# EAGLE board hhv-dcdarknet-display (EAGLE 7.2.0)
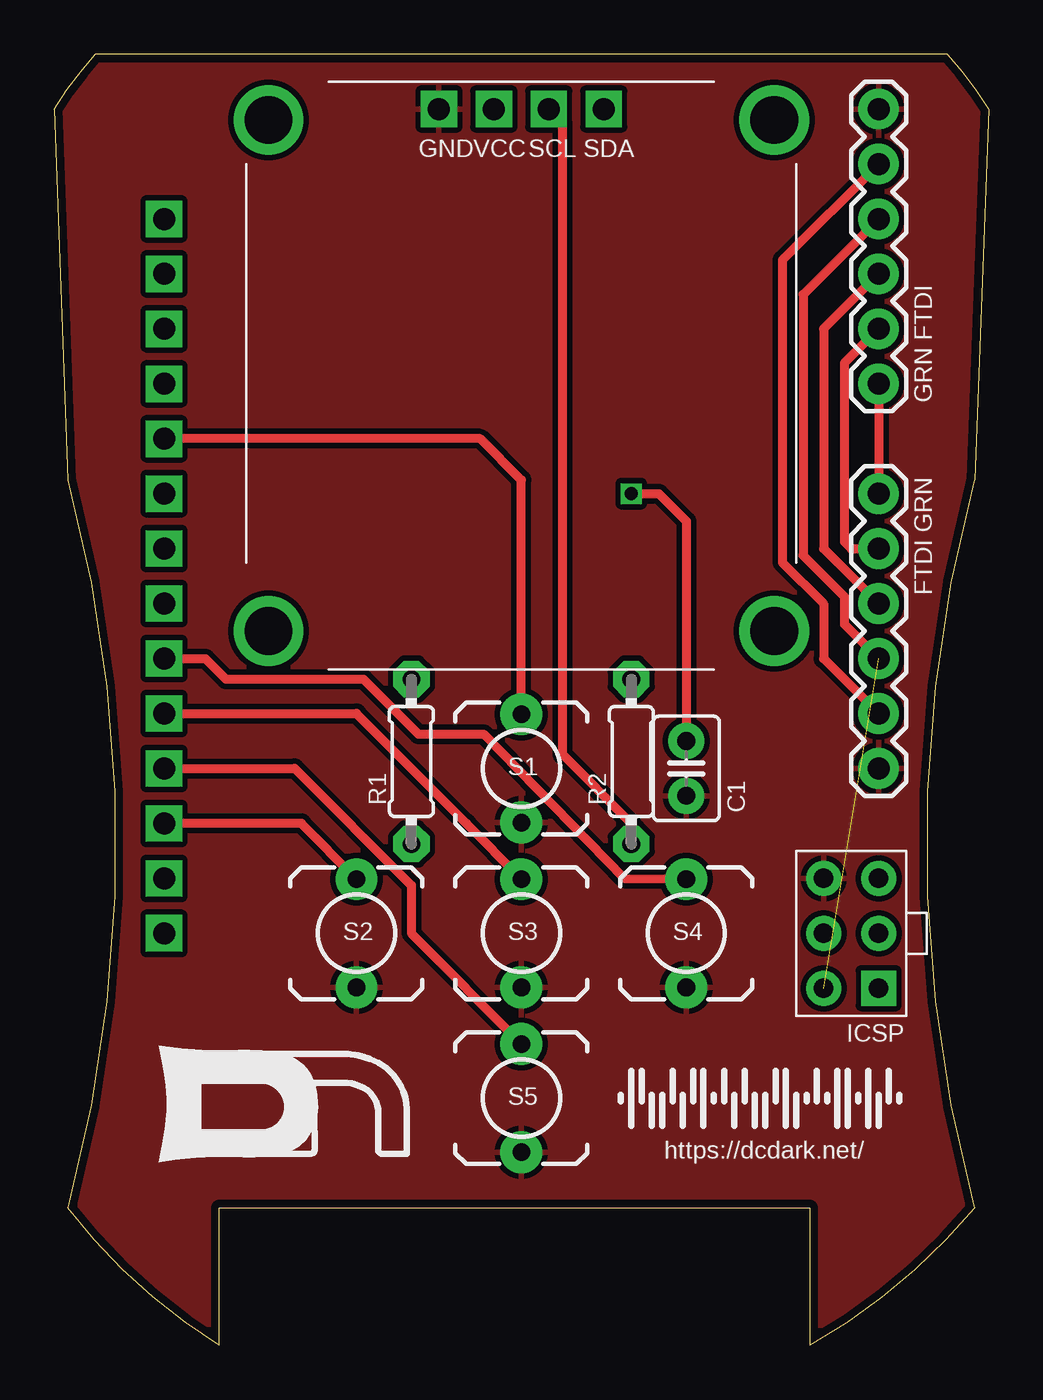
[diagram p0: board, top side]
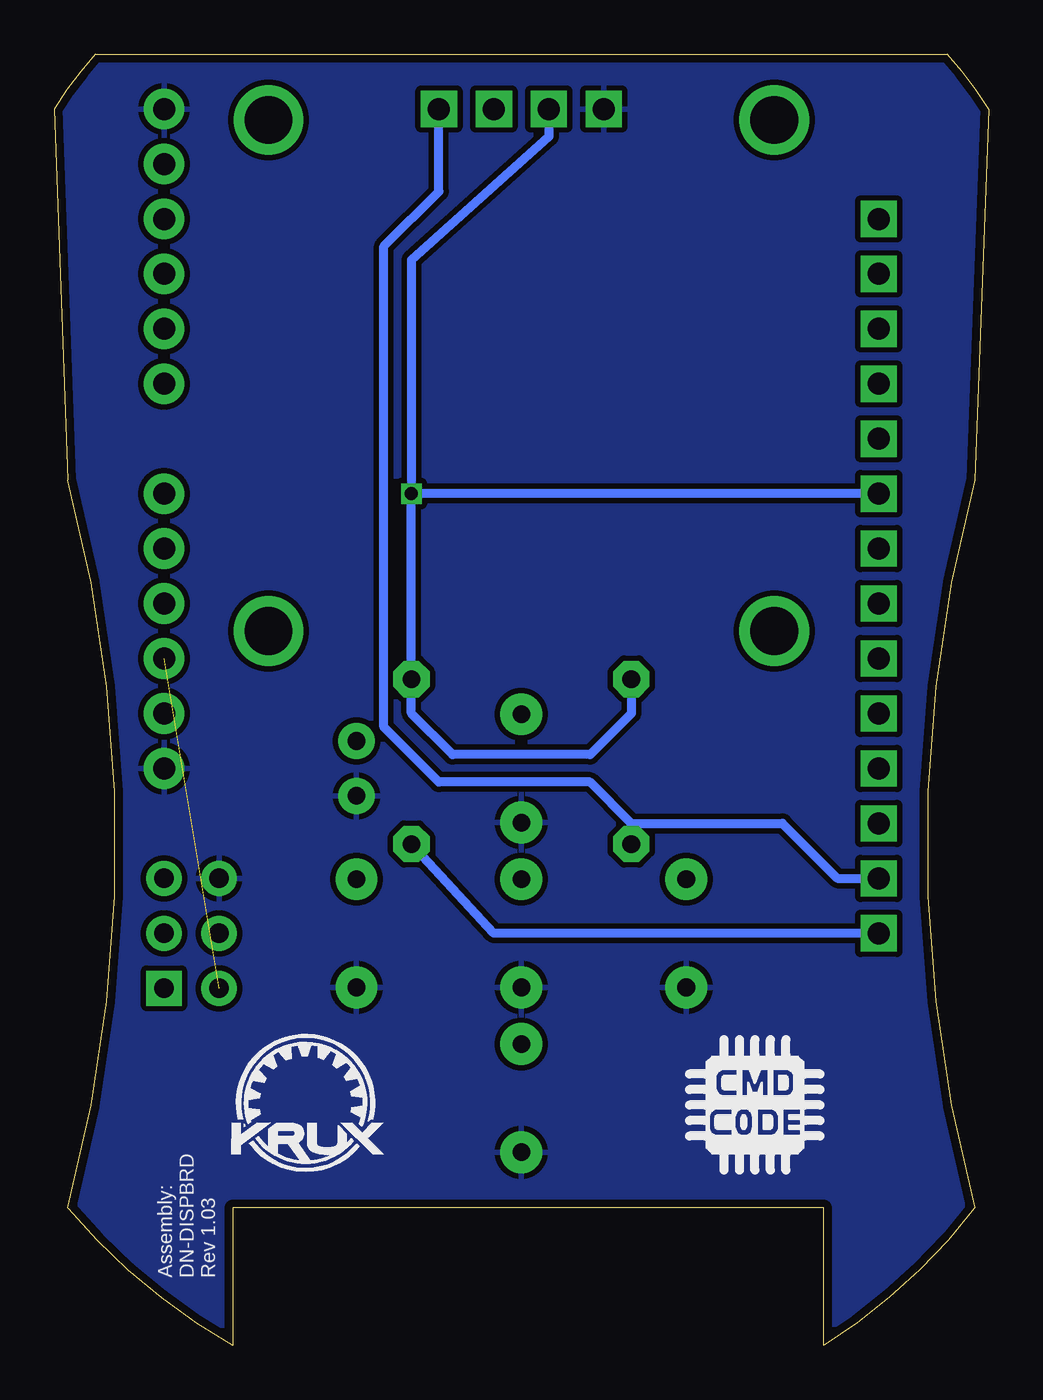
[diagram p1: board, bottom side, seen from below]

Size 43.18 x 59.69 mm. Coordinates in mm from the lower left corner, seen from the top.
Outline: 0.63,40.01 arc-30 0.63,6.35 arc20 7.62,0 7.62,6.35 34.93,6.35 34.93,0 arc20 42.54,6.35 arc-30 42.54,40.01 43.18,57.15 arc10 41.27,59.69 1.91,59.69 arc10 0,57.15 0.63,40.01
Copper layers (1*16): Top 0.0356mm / dielectric 1.5011mm / Bottom 0.0356mm
Design rules "LaenPCBOrder": minimum track width 6mil, minimum drill 13mil, track to track 6mil, track to pad 6mil, pad to pad 6mil, via to via 6mil, smd to smd 6mil, copper to edge 15mil, drill to drill 6mil, minimum pad ring 7mil, minimum via ring 7mil, stop-mask expansion 4mil, vias tented up to drill 0mil, thermal gap 10mil
Net classes: 0 default: clearance 0.205 mm

## Footprints (pad centres in the part's own frame; a part is rotated, then mirrored left to right if it is on the bottom)
C025-030X050 = drill 0.813 pad 1.676: 1 -1.27,0; 2 1.27,0
AVRISP = drill 0.9 pad 1.626 square: 1 -1.27,2.54 | drill 0.9 pad 1.626: 2 1.27,2.54; 3 -1.27,0; 4 1.27,0; 5 -1.27,-2.54; 6 1.27,-2.54
FTDI_BASIC = drill 1.016 pad 1.88: CTS 10.16,0; DTR 0,0; GND 12.7,0; RXI 2.54,0; TXO 5.08,0; VCC 7.62,0
1X1-SMALL_CUT = drill 1.016 pad 1.676 square: P$1 0,0
0204/7 = drill 0.813 pad 1.676 octagon: 1 -3.81,0; 2 3.81,0
TACTILE-2PIN = drill 0.813 pad 1.93: P$1 2.502,0; P$2 -2.502,0
I2C_0.96_OLED = drill 1.016 pad 1.676 square: GND -3.81,0; SCL 1.27,0; SDA 3.81,0; VCC -1.27,0 | drill 2.2: P$5 11.684,-0.508; P$6 -11.684,-0.508; P$7 11.684,-24.13; P$8 -11.684,-24.13

## Placement (x,y rotation side)
C1  .1uF  [C025-030X050]  29.21,26.67 270 top
JP1  JP1  [AVRISP]  36.83,19.05 180 top
JP2  FTDI_BASICPTH  [FTDI_BASIC]  38.1,39.37 270 top
JP3  FTDI_BASICPTH  [FTDI_BASIC]  38.1,44.45 90 top
JP17  [1X1-SMALL_CUT]  5.08,52.07 0 top
JP18  [1X1-SMALL_CUT]  5.08,49.53 0 top
JP19  [1X1-SMALL_CUT]  5.08,46.99 0 top
JP20  [1X1-SMALL_CUT]  5.08,44.45 0 top
JP21  [1X1-SMALL_CUT]  5.08,41.91 0 top
JP22  [1X1-SMALL_CUT]  5.08,39.37 0 top
JP23  [1X1-SMALL_CUT]  5.08,36.83 0 top
JP24  [1X1-SMALL_CUT]  5.08,34.29 0 top
JP25  [1X1-SMALL_CUT]  5.08,31.75 0 top
JP26  [1X1-SMALL_CUT]  5.08,29.21 0 top
JP27  [1X1-SMALL_CUT]  5.08,26.67 0 top
JP28  [1X1-SMALL_CUT]  5.08,24.13 0 top
JP29  [1X1-SMALL_CUT]  5.08,21.59 0 top
JP30  [1X1-SMALL_CUT]  5.08,19.05 0 top
R1  [0204/7]  16.51,26.99 90 top
R2  [0204/7]  26.67,26.99 90 top
S1  UP  [TACTILE-2PIN]  21.59,26.67 270 top
S2  LEFT  [TACTILE-2PIN]  13.97,19.05 270 top
S3  CENTER  [TACTILE-2PIN]  21.59,19.05 270 top
S4  RIGHT  [TACTILE-2PIN]  29.21,19.05 270 top
S5  DOWN  [TACTILE-2PIN]  21.59,11.43 270 top
U$1  KRUX_LOGO  [KRUX_LOGO]  31.59,11.27 0 bottom
U$2  DN_LOGO  [DN_LOGO]  4.45,8.57 0 top
U$3  I2C_0.96_OLEDOLED  [I2C_0.96_OLED]  21.59,57.15 0 top
U$4  CMDC0DE_LOGO  [CMDC0DE]  10.8,11.11 0 bottom

## Library data of the parts
C1 JP17-JP30 = adafruit
JP1 R1 R2 S1-S5 U$1-U$4 = SYNShop
JP2 JP3 = SparkFun

## Nets
+3V3: C1.1 JP22.P$1 R1.2 R2.2 U$3.VCC
+5V: JP1.2 JP2.VCC JP3.VCC
GND: C1.2 JP1.6 JP2.GND JP3.GND S1.P$1 S2.P$1 S3.P$1 S4.P$1 S5.P$1 U$3.GND
N$1: JP2.DTR JP3.DTR
N$2: JP2.RXI JP3.RXI
N$3: JP2.TXO JP3.TXO
N$4: JP2.CTS JP3.CTS
PIN15: JP17.P$1
PIN16: JP18.P$1
PIN17: JP19.P$1
PIN18: JP20.P$1
PIN19: JP21.P$1 S1.P$2
PIN21: JP23.P$1
PIN22: JP24.P$1
PIN23: JP25.P$1 S4.P$2
PIN24: JP26.P$1 S3.P$2
PIN25: JP27.P$1 S5.P$2
PIN26: JP28.P$1 S2.P$2
PIN27: JP29.P$1 R1.1 U$3.SDA
PIN28: JP30.P$1 R2.1 U$3.SCL

## Tracks (layer width: path | path; a pad name or v marks a point on that pad's centre or on a via)
+3V3  (via drill 0.6)
  Top 0.406: v26.67,39.37 27.94,39.37 29.21,38.1 C1.1
  Bottom 0.406: JP22.P$1 v26.67,39.37 | v26.67,39.37 R2.2 26.67,29.21 24.76,27.3 18.41,27.3 16.51,29.21 R1.2 | U$3.VCC 20.32,55.88 26.67,50.16 v26.67,39.37
+5V  (1 unrouted)
  Top 0.406: JP3.VCC 34.61,48.58 34.61,36.51 36.51,34.61 36.51,33.34 JP2.VCC
GND
  pour Top (isolate 0.254): 2.22,59.37 0,57.15 0.63,40.01 1.27,38.1 2.54,30.48 2.86,20.64 2.22,13.34 0.63,6.35 2.54,4.13 4.76,1.91 7.62,0 7.62,6.35 34.93,6.35 34.93,0 36.83,1.27 39.37,3.49 42.23,6.35 41.27,11.11 40.64,16.19 40.32,24.77 40.96,32.7 42.54,40.01 43.18,56.83 40.96,59.69
  pour Bottom (isolate 0.254): 2.22,59.37 0,57.15 0.63,40.01 1.27,38.1 2.54,30.48 2.86,20.64 2.22,13.34 0.63,6.35 2.54,4.13 4.76,1.91 7.62,0 7.62,6.35 34.93,6.35 34.93,0 36.83,1.27 39.37,3.49 42.23,6.35 41.27,11.11 40.64,16.19 40.32,24.77 40.96,32.7 42.54,40.01 43.18,56.83 40.96,59.69
N$1
  Top 0.406: JP3.DTR JP2.DTR
N$2
  Top 0.406: JP3.RXI 36.51,45.4 36.51,37.15 36.83,36.83 JP2.RXI
N$3
  Top 0.406: JP3.TXO 35.56,46.99 35.56,36.83 JP2.TXO
N$4
  Top 0.406: JP3.CTS 33.65,50.16 33.65,36.2 35.56,34.29 35.56,31.75 JP2.CTS
PIN19
  Top 0.406: S1.P$2 21.59,40.01 19.69,41.91 JP21.P$1
PIN23
  Top 0.406: JP25.P$1 6.98,31.75 7.94,30.8 14.29,30.8 16.83,28.26 19.84,28.26 26.35,21.59 S4.P$2
PIN24
  Top 0.406: JP26.P$1 13.97,29.21 19.05,24.13 S3.P$2
PIN25
  Top 0.406: JP27.P$1 11.11,26.67 16.51,21.27 16.51,19.05 S5.P$2
PIN26
  Top 0.406: S2.P$2 11.43,24.13 JP28.P$1
PIN27
  Bottom 0.406: 16.51,24.13 9.52,24.13 6.98,21.59 JP29.P$1 | R1.1 16.51,24.13 | 16.51,24.13 18.41,26.04 25.4,26.04 27.94,28.57 27.94,50.8 25.4,53.34 U$3.SDA
PIN28
  Top 0.406: R2.1 26.67,24.13 23.49,27.3 23.49,56.52 U$3.SCL
  Bottom 0.406: JP30.P$1 22.86,19.05 R2.1

## Text on the board
_tsilk: GND | VCC | SCL | SDA | GRN FTDI | FTDI GRN | ICSP | https://dcdark.net/
_bsilk: Assembly: / DN-DISPBRD / Rev 1.03